# Altium PCB PCBtc.PcbDoc (part 3 of 3)
Units mm, origin at the board's own origin, x right, y up, seen from the top; angles counter-clockwise.
Board outline 94.5 x 103.5 mm, 2 copper layers (Top Layer, Bottom Layer), stack 1.671 mm thick; 71 components, 63 nets, 236 pads, 46 vias.
Unrouted connection lines stored in the file: 2.
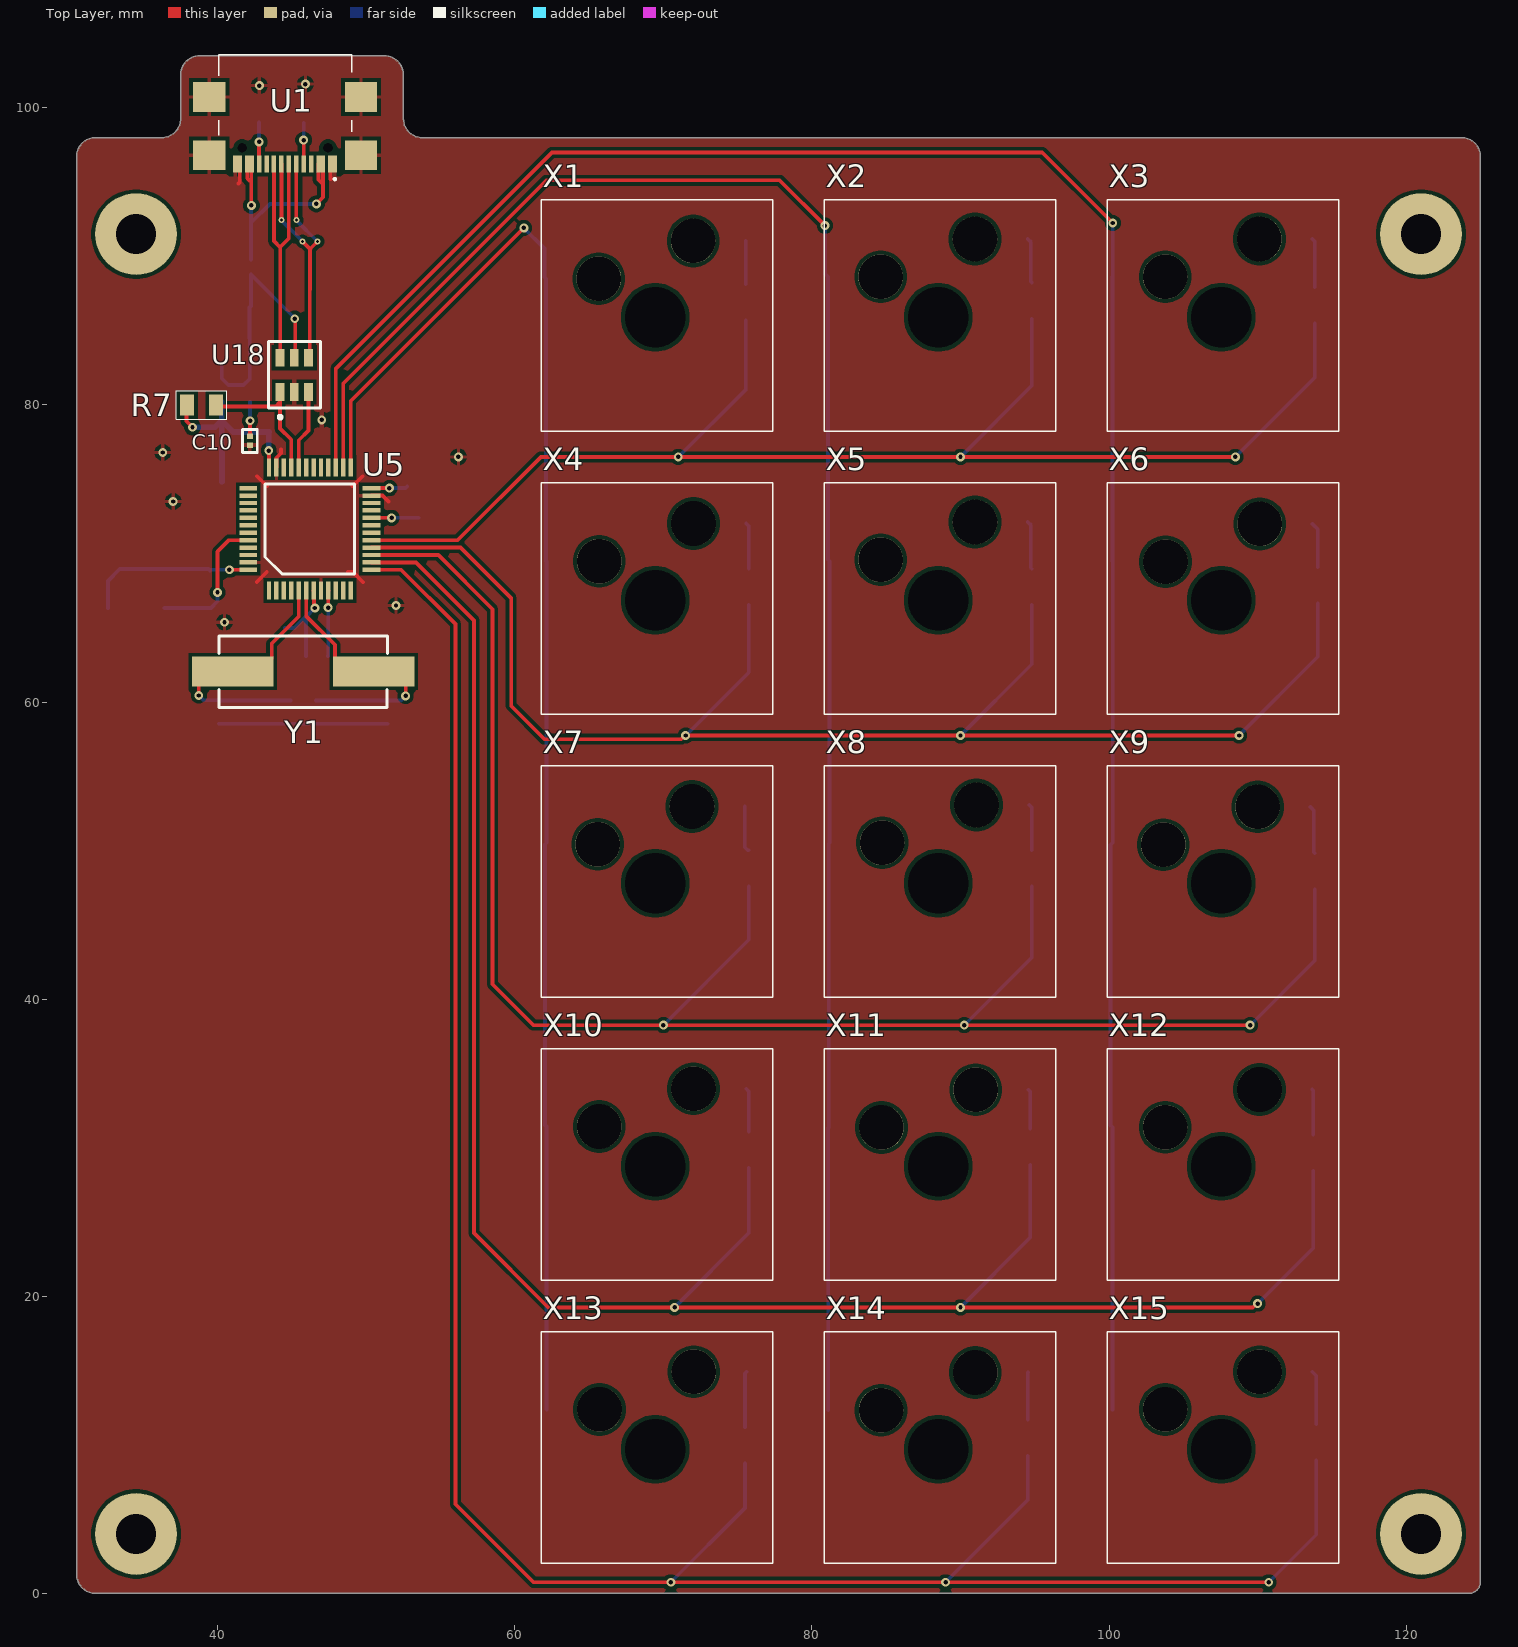
[diagram p0: Top Layer view]

## Part data (continued)
Y1: library part ECS-80-20-5PXDU-TR, "Crystal 8MHz ±30ppm (Tol) ±100ppm (Stability) 20pF FUND 60Ohm 2-Pin SMD T/R", ESR (Equivalent Series Resistance)=60Ω, Frequency Stability=100ppm, Frequency Tolerance=0.003%, Load Capacitance=20pF, Manufacturer="ECS International", Max Operating Temperature=125°C, Min Operating Temperature=-55°C, Supplier Part Number=XC1526CT-ND, Category=Crystals, China RoHS=Compliant, ComponentLink1Description=https://datasheet.octopart.com:443/ECS-80-20-5PXDU-TR-ECS-International-datasheet-17018830.pdf?src-supplier=IHS, ComponentLink1URL=https://datasheet.octopart.com:443/ECS-80-20-5PXDU-TR-ECS-International-datasheet-17018830.pdf?src-supplier=IHS, ComponentLink2Description=https://datasheet.octopart.com:443/ECS-80-20-5PXDU-TR-ECS-International-datasheet-166511516.pdf?src-supplier=Master+Electronics, ComponentLink2URL=https://datasheet.octopart.com:443/ECS-80-20-5PXDU-TR-ECS-International-datasheet-166511516.pdf?src-supplier=Master+Electronics, ComponentLink3Description=https://datasheet.octopart.com:443/ECS-80-20-5PXDU-TR-ECS-International-datasheet-14433430.pdf?src-supplier=Factory+Futures, ComponentLink3URL=https://datasheet.octopart.com:443/ECS-80-20-5PXDU-TR-ECS-International-datasheet-14433430.pdf?src-supplier=Factory+Futures, ComponentLink4Description=https://datasheet.octopart.com:443/ECS-80-20-5PXDU-TR-ECS-International-datasheet-17018642.pdf?src-supplier=Future+Electronics, ComponentLink4URL=https://datasheet.octopart.com:443/ECS-80-20-5PXDU-TR-ECS-International-datasheet-17018642.pdf?src-supplier=Future+Electronics, ComponentLink5Description=https://datasheet.octopart.com:443/ECS-80-20-5PXDU-TR-ECS-datasheet-23531.pdf?src-supplier=Mouser, ComponentLink5URL=https://datasheet.octopart.com:443/ECS-80-20-5PXDU-TR-ECS-datasheet-23531.pdf?src-supplier=Mouser, ESR=60Ω, Frequency=8MHz, Height=4.2926mm, Lead Free="Lead Free", Length=11.4046mm, Lifecycle Status=Production, Manufacturer Part Number=ECS-80-20-5PXDU-TR, Mounting Technology="Surface Mount", Packaging="Cut Tape (CT)", Pricing="1=0,44, 10=0,384, 25=0,3632, 50=0,3482, 100=0,3337, 250=0,31564, 500=0,30256 (USD)", REACH SVHC=Yes, RoHS=Compliant, Schedule B="8541600025, 8541600025|8541600025, 8541600025|8541600025|8541600025, 8541600025|8541600025|8541600025|8541600025", Stock=26910, Supplier=DigiKey, Termination=SMD/SMT, Tolerance=0.003%, Width=4.8006mm

## Free pads (board coordinates)
  round 5.5 hole 2.7 unplated: 3(34.5,4) 3(34.5,91.5) 3(121,4) 3(121,91.5)

## Via types
v1: diameter 0.6, hole 0.3, Top Layer to Bottom Layer, 42 vias
v2: diameter 0.4, hole 0.2, Top Layer to Bottom Layer, 4 vias

## Nets (pads, with @x,y where several pads share a name; then routed paths per layer and width w, separated by ;. In a path a pad name is that pad's centre, name@x,y a point inside that pad or via, vN(x,y) a via of type N, cw(c..) or ccw(c..) an arc to the next point about the centre after c; other vN are vias at no path point)
5V: C8.1 C9.2 F1.2 U18.5 U19.1 U19.3 | length 17.1
  Top Layer w0.254: U18.5 45.216,83.247 45.216,85.774 v1(45.184,85.806)
  Bottom Layer w0.254: U19.1 40.268,81.778 40.708,81.338 41.733,81.338 42.148,81.753 U19.3 42.148,84.498 C9.2 C8.1@42.133,86.563 ; C8.1 C8.1@42.133,86.563 ; v1(45.184,85.806) 45.184,85.831 F1.2 42.234,86.663 C8.1@42.133,86.563
BOOT0: R4.1 S1.2 U5.44 | length 9.5
  Top Layer w0.254: v1(39.984,67.381) 39.984,70.125 40.759,70.9 U5.44
  Bottom Layer w0.254: S1.2 R4.1 39.537,66.335 39.984,66.781 v1(39.984,67.381)
BOOT1: R3.1 U5.20 | length 3.2
  Top Layer w0.254: U5.20 51.707,72.4 v1(51.71,72.403)
  Bottom Layer w0.254: v1(51.71,72.403) R3.1
CC1: R1.1 U1.A5 | length 2.8
  Top Layer w0.254: U1.A5 v1(45.784,97.831)
  Bottom Layer w0.254: v1(45.784,97.831) R1.1
CC2: R6.2 U1.B5 | length 2.8
  Top Layer w0.254: U1.B5 v1(42.784,97.706)
  Bottom Layer w0.254: v1(42.784,97.706) R6.2
Coluna1: U2.1 U5.25 U6.1 U9.1 U12.1 U15.1 | length 101.2
  Top Layer w0.254: U5.25 48.95,80.268 v1(60.604,91.922)
  Bottom Layer w0.254: v1(60.604,91.922) 62,90.525 62,88.6 U2.1 62.1,69.505 U6.1 62.125,50.53 U9.1 62.025,31.53 U12.1 62.125,12.405 U15.1
Coluna2: U3.1 U5.26 U7.1 U10.1 U13.1 U16.1 | length 124.9
  Top Layer w0.254: U5.26 48.45,81.45 62.125,95.125 77.825,95.125 v1(80.875,92.075)
  Bottom Layer w0.254: v1(80.875,92.075) 80.875,88.83 U3.1 U7.1 81.175,69.48 U10.1 81.128,50.483 U13.1 81.1,31.336 U16.1
Coluna3: U4.1 U5.27 U8.1 U11.1 U14.1 U17.1 | length 146.9
  Top Layer w0.254: U5.27 47.95,82.45 62.5,97 95.5,97 v1(100.25,92.25)
  Bottom Layer w0.254: U17.1 U14.1 100.1,31.505 U11.1 100.25,50.55 U8.1 100.225,69.475 U4.1 100.25,88.655 v1(100.25,92.25)
D+: R7.1 U1.A6 U1.B6 U5.33 U18.1 U18.6 | length 29.6
  Top Layer w0.254: R7.1 39.979,79.9 43.9,79.9 44.201,80.201 U18.1 44.195,80.875 44.195,78.421 44.95,77.665 U5.33 ; U1.B6 43.784,91.031 44.201,90.614 ; U18.6 44.201,90.614 ; U1.A6 44.784,91.198 44.201,90.614
D-: U1.A7 U1.B7 U5.32 U18.3 U18.4 | length 25.7
  Top Layer w0.254: U1.A7 44.291,96.221 44.291,92.444 v2(44.298,92.436) ; U1.B7 45.291,96.221 45.291,92.444 v2(45.298,92.436) ; U5.32 45.45,77.622 46.101,78.273 U18.3 ; v2(45.709,91.006) 46.21,90.505 ; U18.4 46.198,83.279 46.198,87.736 46.21,87.748 46.21,90.505 ; v2(46.709,91.006) 46.39,90.687 46.39,90.685 46.21,90.505
  Bottom Layer w0.254: v2(44.298,92.436) 44.298,92.427 45.699,91.026 v2@45.709,91.026 ; v2(45.298,92.436) 45.298,92.427 46.699,91.026 v2@46.709,91.026
GND: C1.1 C2.1 C3.1 C4.1 C5.1 C8.2 C9.1 C10.1 C11.1 C12.1 R1.2 R3.2 R4.2 R6.1 U1.A1 U1.A12 U1.B1 U1.B12 U1.MP1 U1.MP2 U1.MP3 U1.MP4 U5.8 U5.23 U5.35 U5.47 U18.2 U19.2 | length 9.2
  Top Layer w0.254: 41.4,94.9 41.484,94.984 U1.B1 ; 42.624,68.074 43.304,68.754 ; 42.646,75.204 43.326,74.524 ; U5.35 43.95,76.45 44.25,76.75 44.25,77 ; U1.B12 47.584,95.216 47.6,95.2 ; 48.75,68.75 49.1,68.75 49.78,68.07 ; 49.074,74.524 49.754,75.204 ; U5.23 51.1,73.9 51.5,73.5
  other v1: 40.453,65.373 52,66.5 37,73.5 56.2,76.5 36.3,76.8 47,79 42.8,101.5 45.9,101.6
Linha1: D1.1 D2.1 D3.1 U5.17 | length 94
  Top Layer w0.254: U5.17 56.15,70.9 61.75,76.5 v1(71,76.5) v1(90,76.5) v1(108.5,76.5)
  Bottom Layer w0.254: v1(71,76.5) 75.55,81.05 D1.1 ; v1(90,76.5) 94.8,81.3 D2.1 ; v1(108.5,76.5) 113.85,81.85 D3.1
Linha2: D4.1 D5.1 D6.1 U5.16 | length 100.5
  Top Layer w0.254: U5.16 56.35,70.4 59.75,67 59.75,59.75 62,57.5 71.178,57.5 71.428,57.75 v1(90,57.75) v1(108.75,57.75)
  Bottom Layer w0.254: v1(71.5,57.75) 75.75,62 D4.1 ; v1(90,57.75) 94.8,62.55 D5.1 ; v1(108.75,57.75) 114.05,63.05 D6.1
Linha3: D7.1 D8.1 D9.1 U5.15 | length 120.9
  Top Layer w0.254: U5.15 54.85,69.9 58.5,66.25 58.5,41 61.25,38.25 v1(70,38.25) v1(90.25,38.25) v1(109.5,38.25)
  Bottom Layer w0.254: v1(70,38.25) 75.75,44 D7.1 ; v1(90.25,38.25) 94.8,42.8 D8.1 ; v1(109.5,38.25) 113.85,42.6 D9.1
Linha4: D10.1 D11.1 D12.1 U5.14 | length 138.2
  Top Layer w0.254: U5.14 53.35,69.4 57.25,65.5 57.25,24.25 62.25,19.25 v1(70.75,19.25) v1(90,19.25) 109.678,19.25 109.928,19.5 v1(110,19.5)
  Bottom Layer w0.254: v1(70.75,19.25) 75.75,24.25 D10.1 ; v1(90,19.25) 94.7,23.95 D11.1 ; v1(110,19.5) 113.75,23.25 D12.1
Linha5: D13.1 D14.1 D15.1 U5.13 | length 153.7
  Top Layer w0.254: U5.13 52.35,68.9 56,65.25 56,6 61.25,0.75 v1(70.5,0.75) v1(89,0.75) v1(110.75,0.75)
  Bottom Layer w0.254: v1(70.5,0.75) 75.5,5.75 D13.1 ; v1(89,0.75) 94.525,6.275 D14.1 ; v1(110.75,0.75) 113.95,3.95 D15.1
NetC6_1: C6.1 C7.1 | length 11.3
  Bottom Layer w0.254: C6.1 C7.1
NetC10_2: C10.2 U19.4 | length 2.4
  Top Layer w0.254: C10.2 42.171,77.9 42.171,78.925 v1(42.183,78.938)
  Bottom Layer w0.254: U19.4 42.166,80.2 42.166,78.955 v1(42.183,78.938)
NetD1_2: D1.2 U2.2 | length 2.9
  Bottom Layer w0.254: D1.2 U2.2
NetD2_2: D2.2 U3.2 | length 3
  Bottom Layer w0.254: U3.2 94.735,90.96 94.735,88.305 D2.2
NetD3_2: D3.2 U4.2 | length 3.3
  Bottom Layer w0.254: U4.2 113.85,90.995 D3.2
NetD4_2: D4.2 U6.2 | length 3.1
  Bottom Layer w0.254: U6.2 75.75,71.845 D4.2
NetD5_2: D5.2 U7.2 | length 3.3
  Bottom Layer w0.254: U7.2 94.735,71.91 94.735,69.035 D5.2
NetD6_2: D6.2 U8.2 | length 3.1
  Bottom Layer w0.254: U8.2 114.05,71.64 D6.2
NetD7_2: D7.2 U9.2 | length 3.1
  Bottom Layer w0.254: U9.2 75.475,50.23 75.685,50.02 D7.2
NetD8_2: D8.2 U10.2 | length 3.1
  Bottom Layer w0.254: U10.2 94.8,52.895 D8.2
NetD9_2: D9.2 U11.2 | length 3.2
  Bottom Layer w0.254: U11.2 113.785,52.705 113.785,49.885 D9.2
NetD10_2: D10.2 U12.2 | length 3
  Bottom Layer w0.254: U12.2 75.75,33.795 D10.2
NetD11_2: D11.2 U13.2 | length 2.7
  Bottom Layer w0.254: U13.2 94.7,33.782 D11.2
NetD12_2: D12.2 U14.2 | length 3.1
  Bottom Layer w0.254: U14.2 113.75,33.845 D12.2
NetD13_2: D13.2 U15.2 | length 3.8
  Bottom Layer w0.254: D13.2 75.5,14.82 U15.2
NetD14_2: D14.2 U16.2 | length 3.2
  Bottom Layer w0.254: D14.2 94.525,14.845 U16.2
NetD15_2: D15.2 U17.2 | length 3.6
  Bottom Layer w0.254: U17.2 113.95,14.645 D15.2
OSIN: C6.2 R5.2 U5.5 Y1.1 | length 16.6
  Top Layer w0.254: v1(38.724,60.442) 38.724,61.183 Y1.1@39.597,62.056 ; Y1.1 42.759,62.056 43.632,62.929 43.632,63.933 45.45,65.752 U5.5
  Bottom Layer w0.254: v1(38.724,60.442) 39.044,60.122 40.063,60.122 C6.2 44.879,60.097 44.88,60.099 R5.2
OSOUT: C7.2 R5.1 U5.6 Y1.2 | length 15.9
  Top Layer w0.254: U5.6 45.95,65.79 47.886,63.854 47.886,62.929 48.759,62.056 Y1.2 ; Y1.2@52.212,61.62 52.649,61.183 v1(52.649,60.417)
  Bottom Layer w0.254: R5.1 46.611,60.097 C7.2 52.329,60.097 v1(52.649,60.417)
PA0: U5.10
PA1: U5.11
PA2: U5.12
PA8: U5.29
PA9: U5.30
PA10: U5.31
PA15: U5.38
PB0: U5.18
PB1: U5.19
PB3: U5.39
PB4: U5.40
PB5: U5.41
PB6: U5.42
PB7: U5.43
PB8: U5.45
PB9: U5.46
PB10: U5.21
PB11: U5.22
PB15: U5.28
PC13: U5.2
PC14: U5.3
PC15: U5.4
RESET: C5.2 R2.1 U5.7 | length 6.4
  Top Layer w0.254: U5.7 46.473,67.477 46.473,66.392 v1(46.534,66.331)
  Bottom Layer w0.254: C5.2 45.161,64.981 45.911,65.731 45.934,65.731 ; R2.1 45.934,63.105 45.934,65.731 ; v1(46.534,66.331) 45.934,65.731
SWCLK: U5.37
SWIO: U5.34
VBAT: U5.1
Vbus: F1.1 U1.A4 U1.A9 U1.B4 U1.B9 | length 16.9
  Top Layer w0.254: U1.A9@41.984,95.78 41.984,95.255 42.133,95.106 42.259,95.106 ; U1.A9 U1.B4 42.261,96.205 42.261,95.66 42.259,95.658 42.259,95.106 ; v1(42.259,93.431) 42.259,95.106 ; v1(46.634,93.531) 47.084,93.981 47.084,94.856 ; U1.B9 46.784,95.156 47.084,94.856 ; U1.A4 47.084,94.856
  Bottom Layer w0.254: F1.1 42.246,89.794 42.246,92.269 ; v1(42.259,93.431) 42.246,93.419 42.246,92.269 ; v1(46.634,93.531) 43.509,93.531 42.246,92.269
VCC3V3: C1.2 C2.2 C3.2 C4.2 C11.2 C12.2 R2.2 R7.2 S1.1 U5.9 U5.24 U5.36 U5.48 U19.5 | length 33.8
  Top Layer w0.254: R7.2 37.9,79.979 37.9,78.9 v1(38.3,78.5) ; v1(40.784,68.906) 40.787,68.903 42.047,68.903 U5.48 ; v1(43.434,76.931) 43.442,76.923 43.442,75.808 U5.36 ; v1(47.434,66.356) 47.442,66.364 47.442,67.492 U5.9 ; U5.24 50.353,74.403 51.556,74.403 v1(51.559,74.406)
  Bottom Layer w0.254: S1.1 32.605,68.152 33.409,68.956 39.384,68.956 C1.2 39.534,68.906 v1(40.784,68.906) ; C11.2 C11.2@40.286,74.828 ; C12.2@40.268,76.808 C12.2 ; C2.2@43.434,78.156 C2.2 ; C4.2 C4.2@47.434,64.906 ; R2.2 47.434,63.105 C4.2@47.434,64.906 ; v1(47.434,66.356) C4.2@47.434,64.906 ; v1(51.559,74.406) 52.659,74.406 C3.2
  Bottom Layer w0.381: v1(38.3,78.5) 39.812,78.5 40.268,78.956 ; C12.2@40.268,76.808 40.268,78.956 ; U19.5 40.268,78.956 ; C11.2@40.286,74.828 C12.2 ; v1(43.434,76.931) C2.2@43.434,78.156 ; C2.2 41.043,78.181 40.268,78.956
pads on no net: S1.3 S1.4 U1.A8 U1.B8 U1.MH1 U1.MH2 U2. U3. U4. U6. U7. U8. U9. U10. U11. U12. U13. U14. U15. U16. U17. X1.MH1 X2.MH1 X3.MH1 X4.MH1 X5.MH1 X6.MH1 X7.MH1 X8.MH1 X9.MH1 X10.MH1 X11.MH1 X12.MH1 X13.MH1 X14.MH1 X15.MH1

## Polygon pours and split planes (outlines as drawn)
GND on Top Layer "GND top" (solid, pour order 2): 30.5,1.27 30.5,96.73 cw(c31.77,96.73) 31.77,98 36.23,98 ccw(c36.23,99.27) 37.5,99.27 37.5,102.23 cw(c38.77,102.23) 38.77,103.5 51.23,103.5 cw(c51.23,102.23) 52.5,102.23 52.5,99.27 ccw(c53.77,99.27) 53.77,98 123.73,98 cw(c123.73,96.73) 125,96.73 125,0.77 cw(c124.23,0.77) 124.23,0 31.77,0 cw(c31.77,1.27)
GND on Bottom Layer "GND bottom" (solid, pour order 6): 30.5,1.27 30.5,96.73 cw(c31.77,96.73) 31.77,98 36.23,98 ccw(c36.23,99.27) 37.5,99.27 37.5,102.23 cw(c38.77,102.23) 38.77,103.5 51.23,103.5 cw(c51.23,102.23) 52.5,102.23 52.5,99.27 ccw(c53.77,99.27) 53.77,98 123.73,98 cw(c123.73,96.73) 125,96.73 125,0.77 cw(c124.23,0.77) 124.23,0 31.77,0 cw(c31.77,1.27)
VCC3V3 on Bottom Layer "VCC3V3_L02_P005" (solid, pour order 5): 42.3,77.2 49.6,77.2 52.1,75.13 52.1,68.4 49.6,65.9 42.6,65.9 40.3,68.2 40.3,72.1

## Silkscreen, mask and mechanical layers (free items; w line width, h text height)
Boards outline:
  lines w0.2: 30.5,1.27 ccw(c31.77,1.27) 31.77,0 113.5,0 117.23,0 124.23,0 ccw(c124.23,0.77) 125,0.77 125,96.73 ccw(c123.73,96.73) 123.73,98 117.23,98 53.77,98 cw(c53.77,99.27) 52.5,99.27 52.5,102.23 ccw(c51.23,102.23) 51.23,103.5 38.77,103.5 ccw(c38.77,102.23) 37.5,102.23 37.5,99.27 cw(c36.23,99.27) 36.23,98 31.77,98 ccw(c31.77,96.73) 30.5,96.73 30.5,94.23 30.5,1.27

## Text inside footprints (layer, text, board x,y; h text height)
U19: Bottom Overlay "1" at 38.462,83.184 h1.52 r180